# EAGLE board FlatSat_Final (EAGLE 9.6.2), part 1 of 2
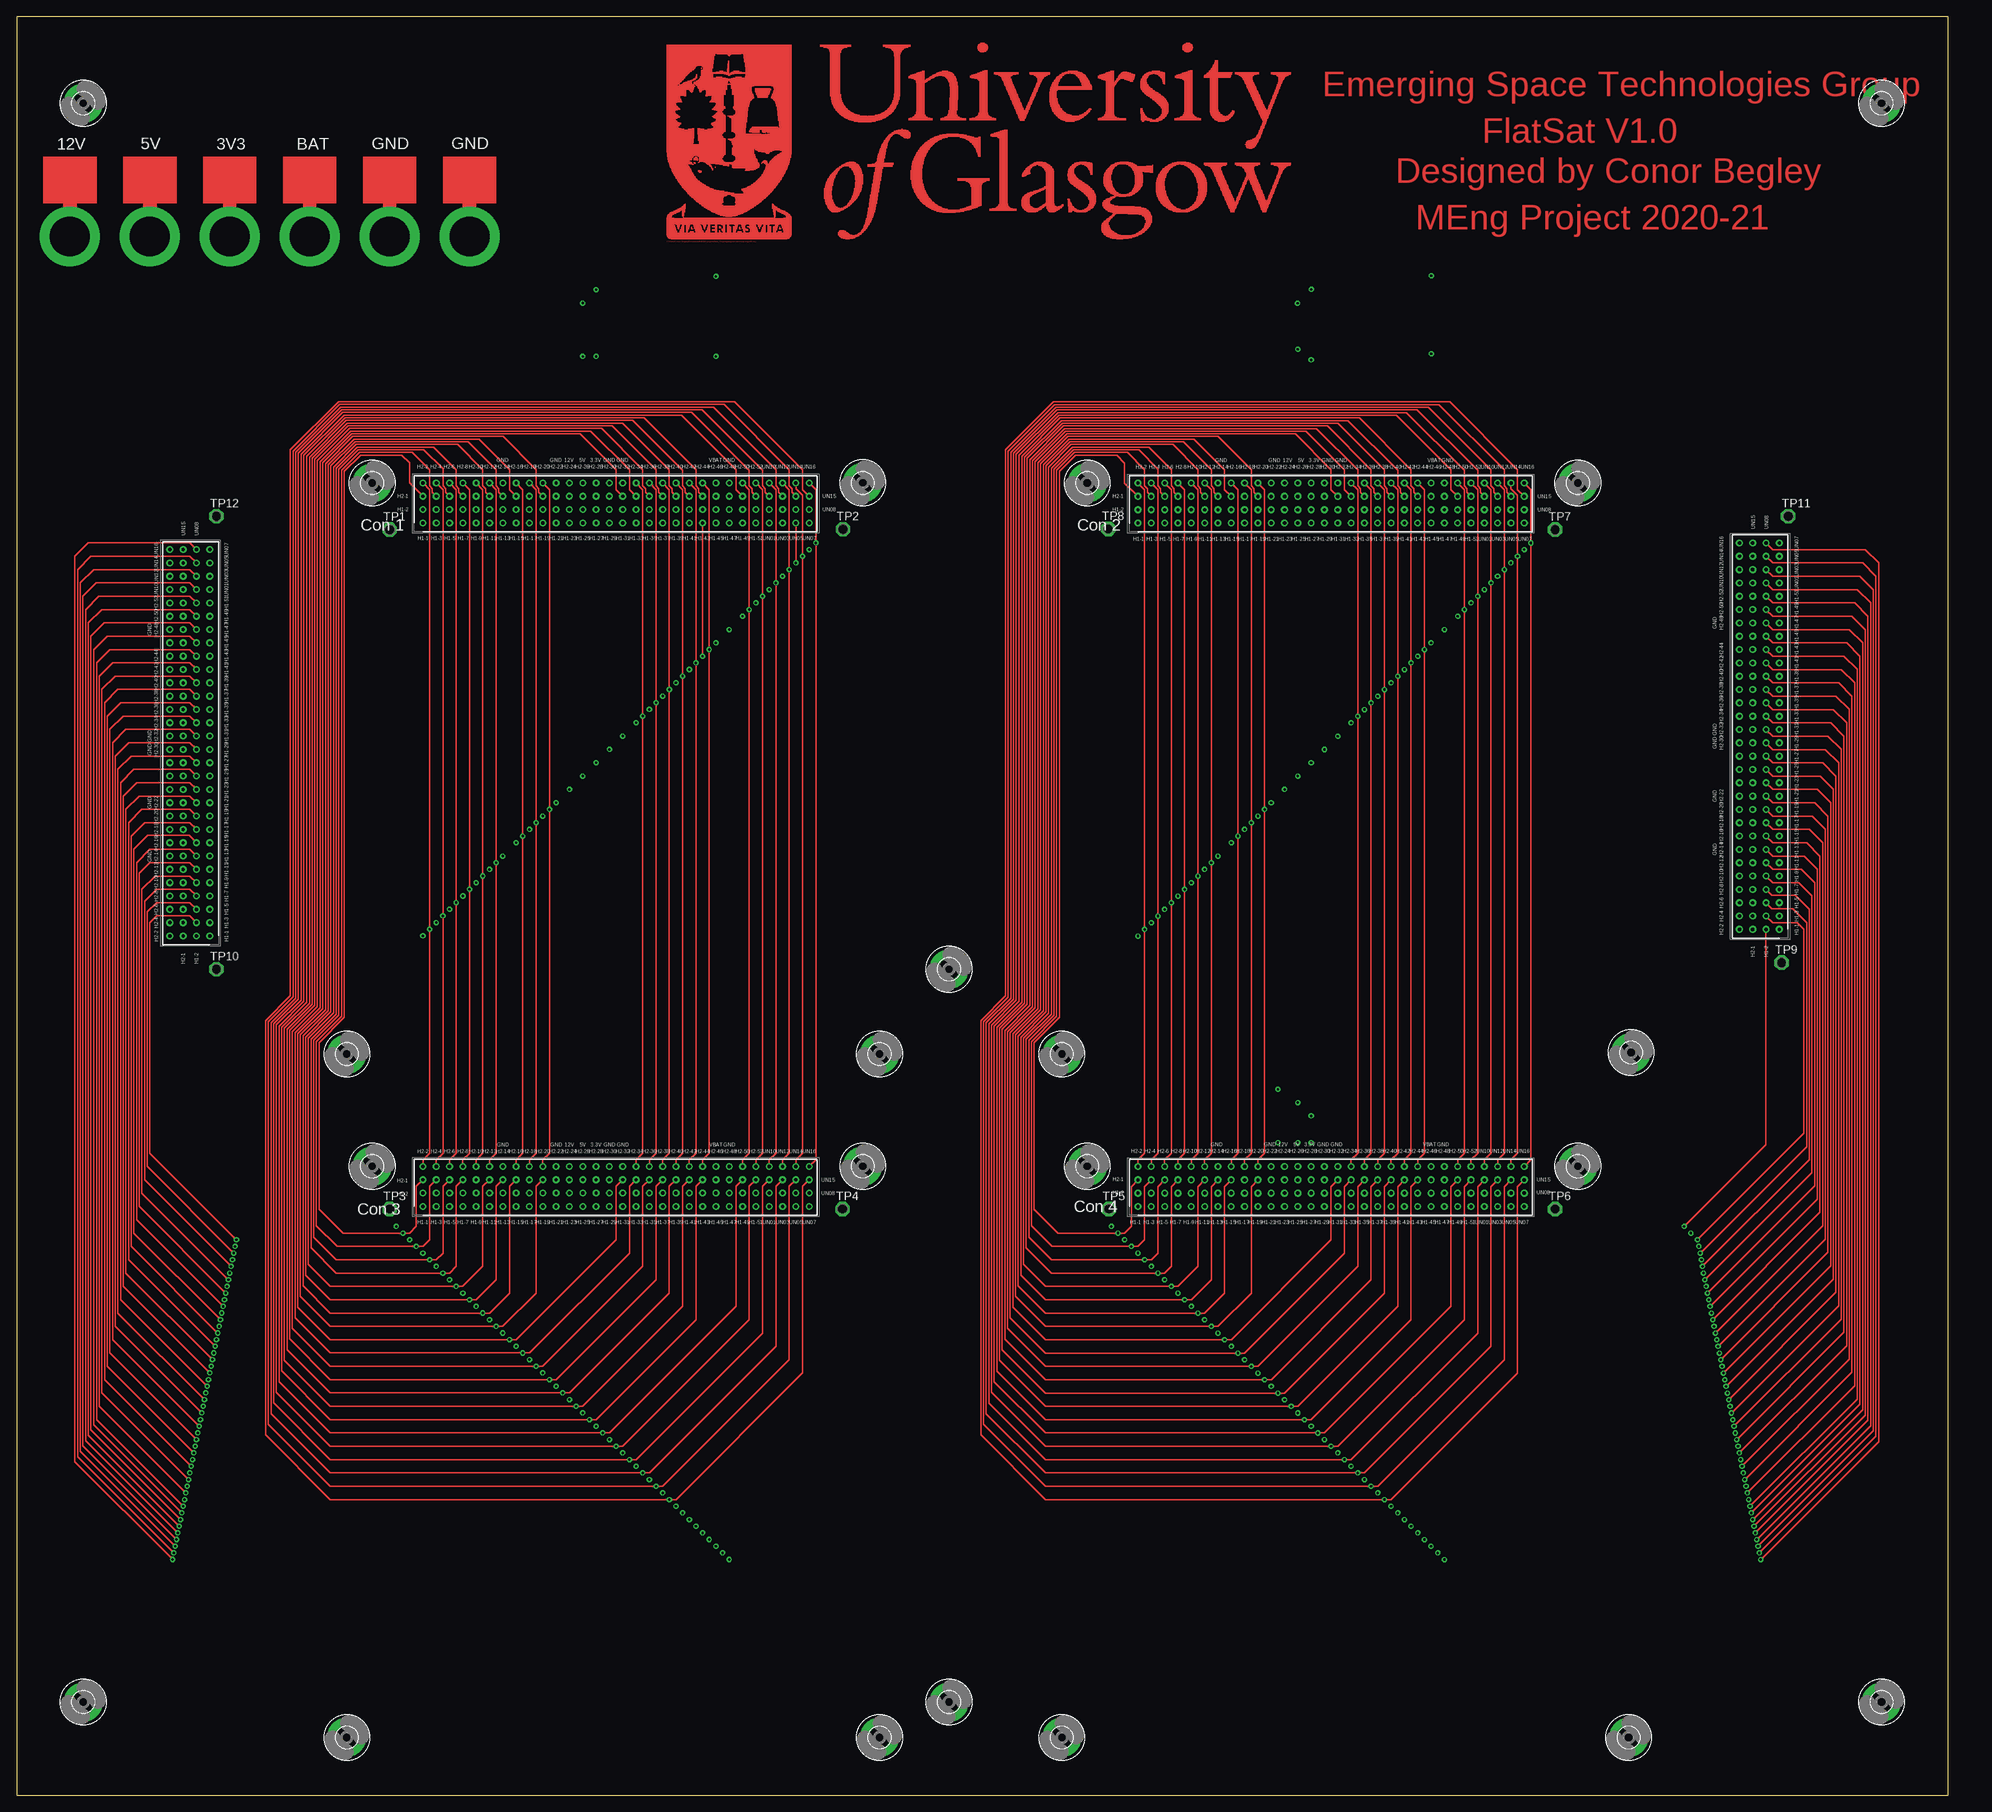
[diagram p0: board, top side]
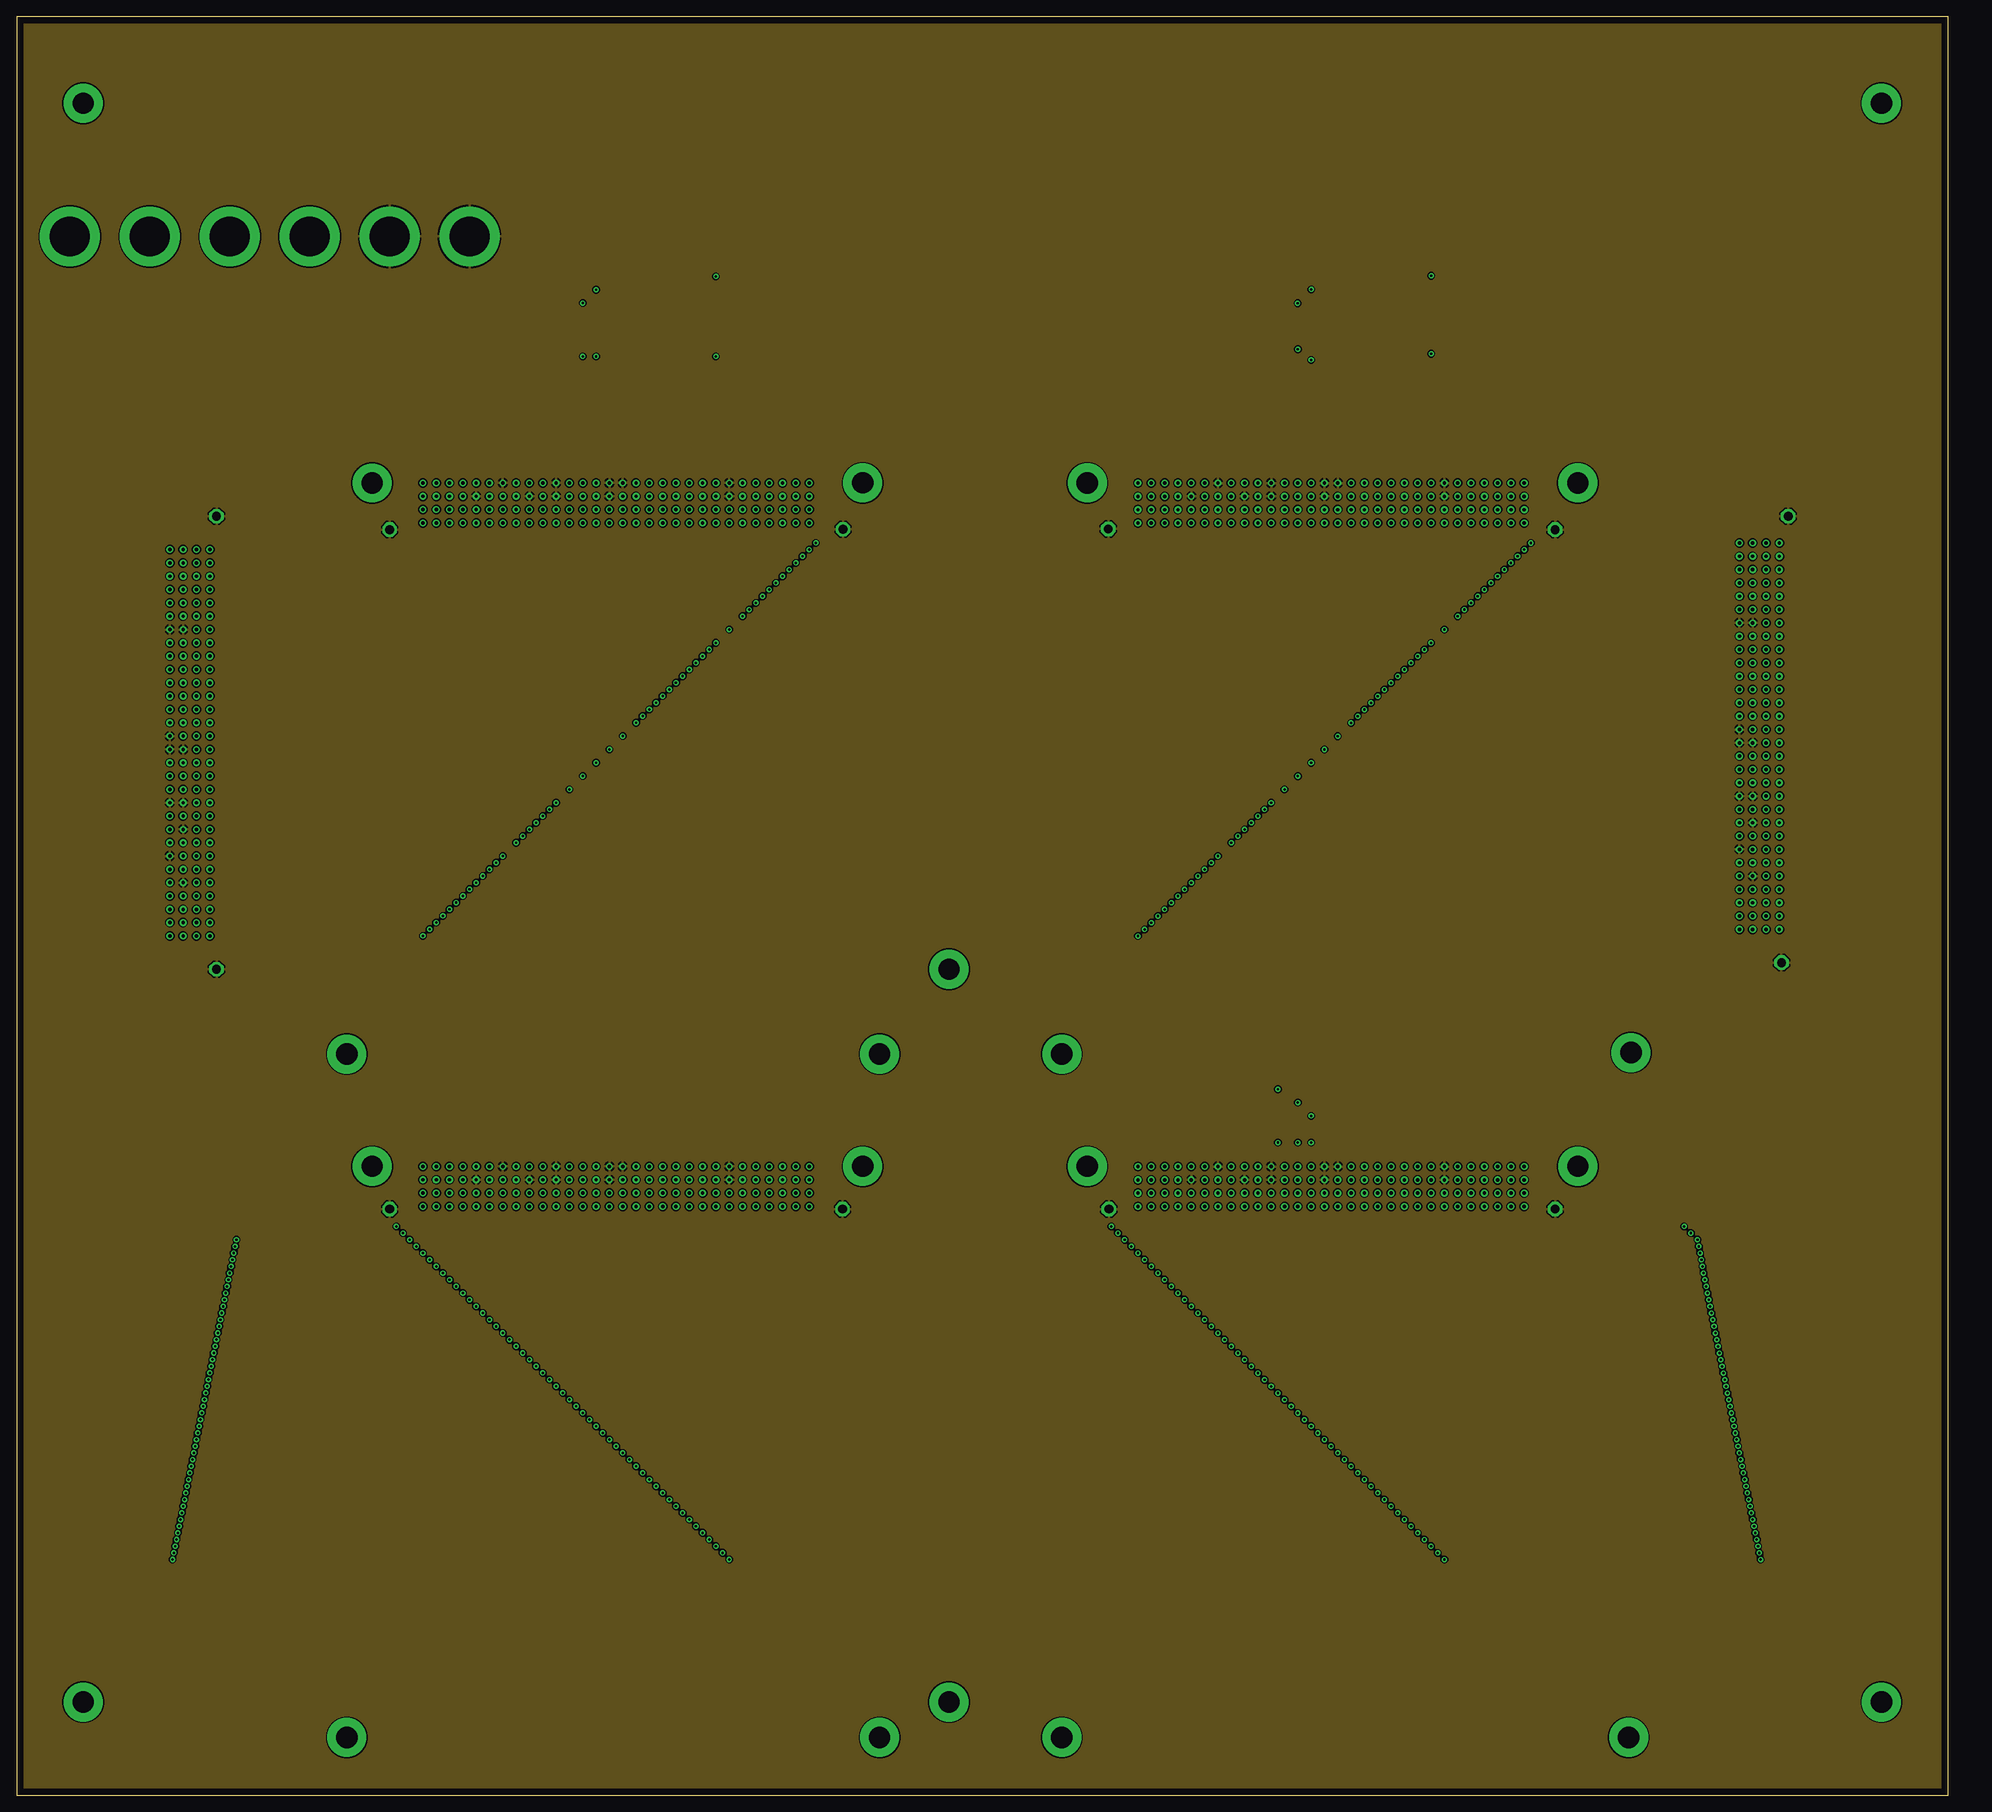
[diagram p1: board, inner layer Route2]
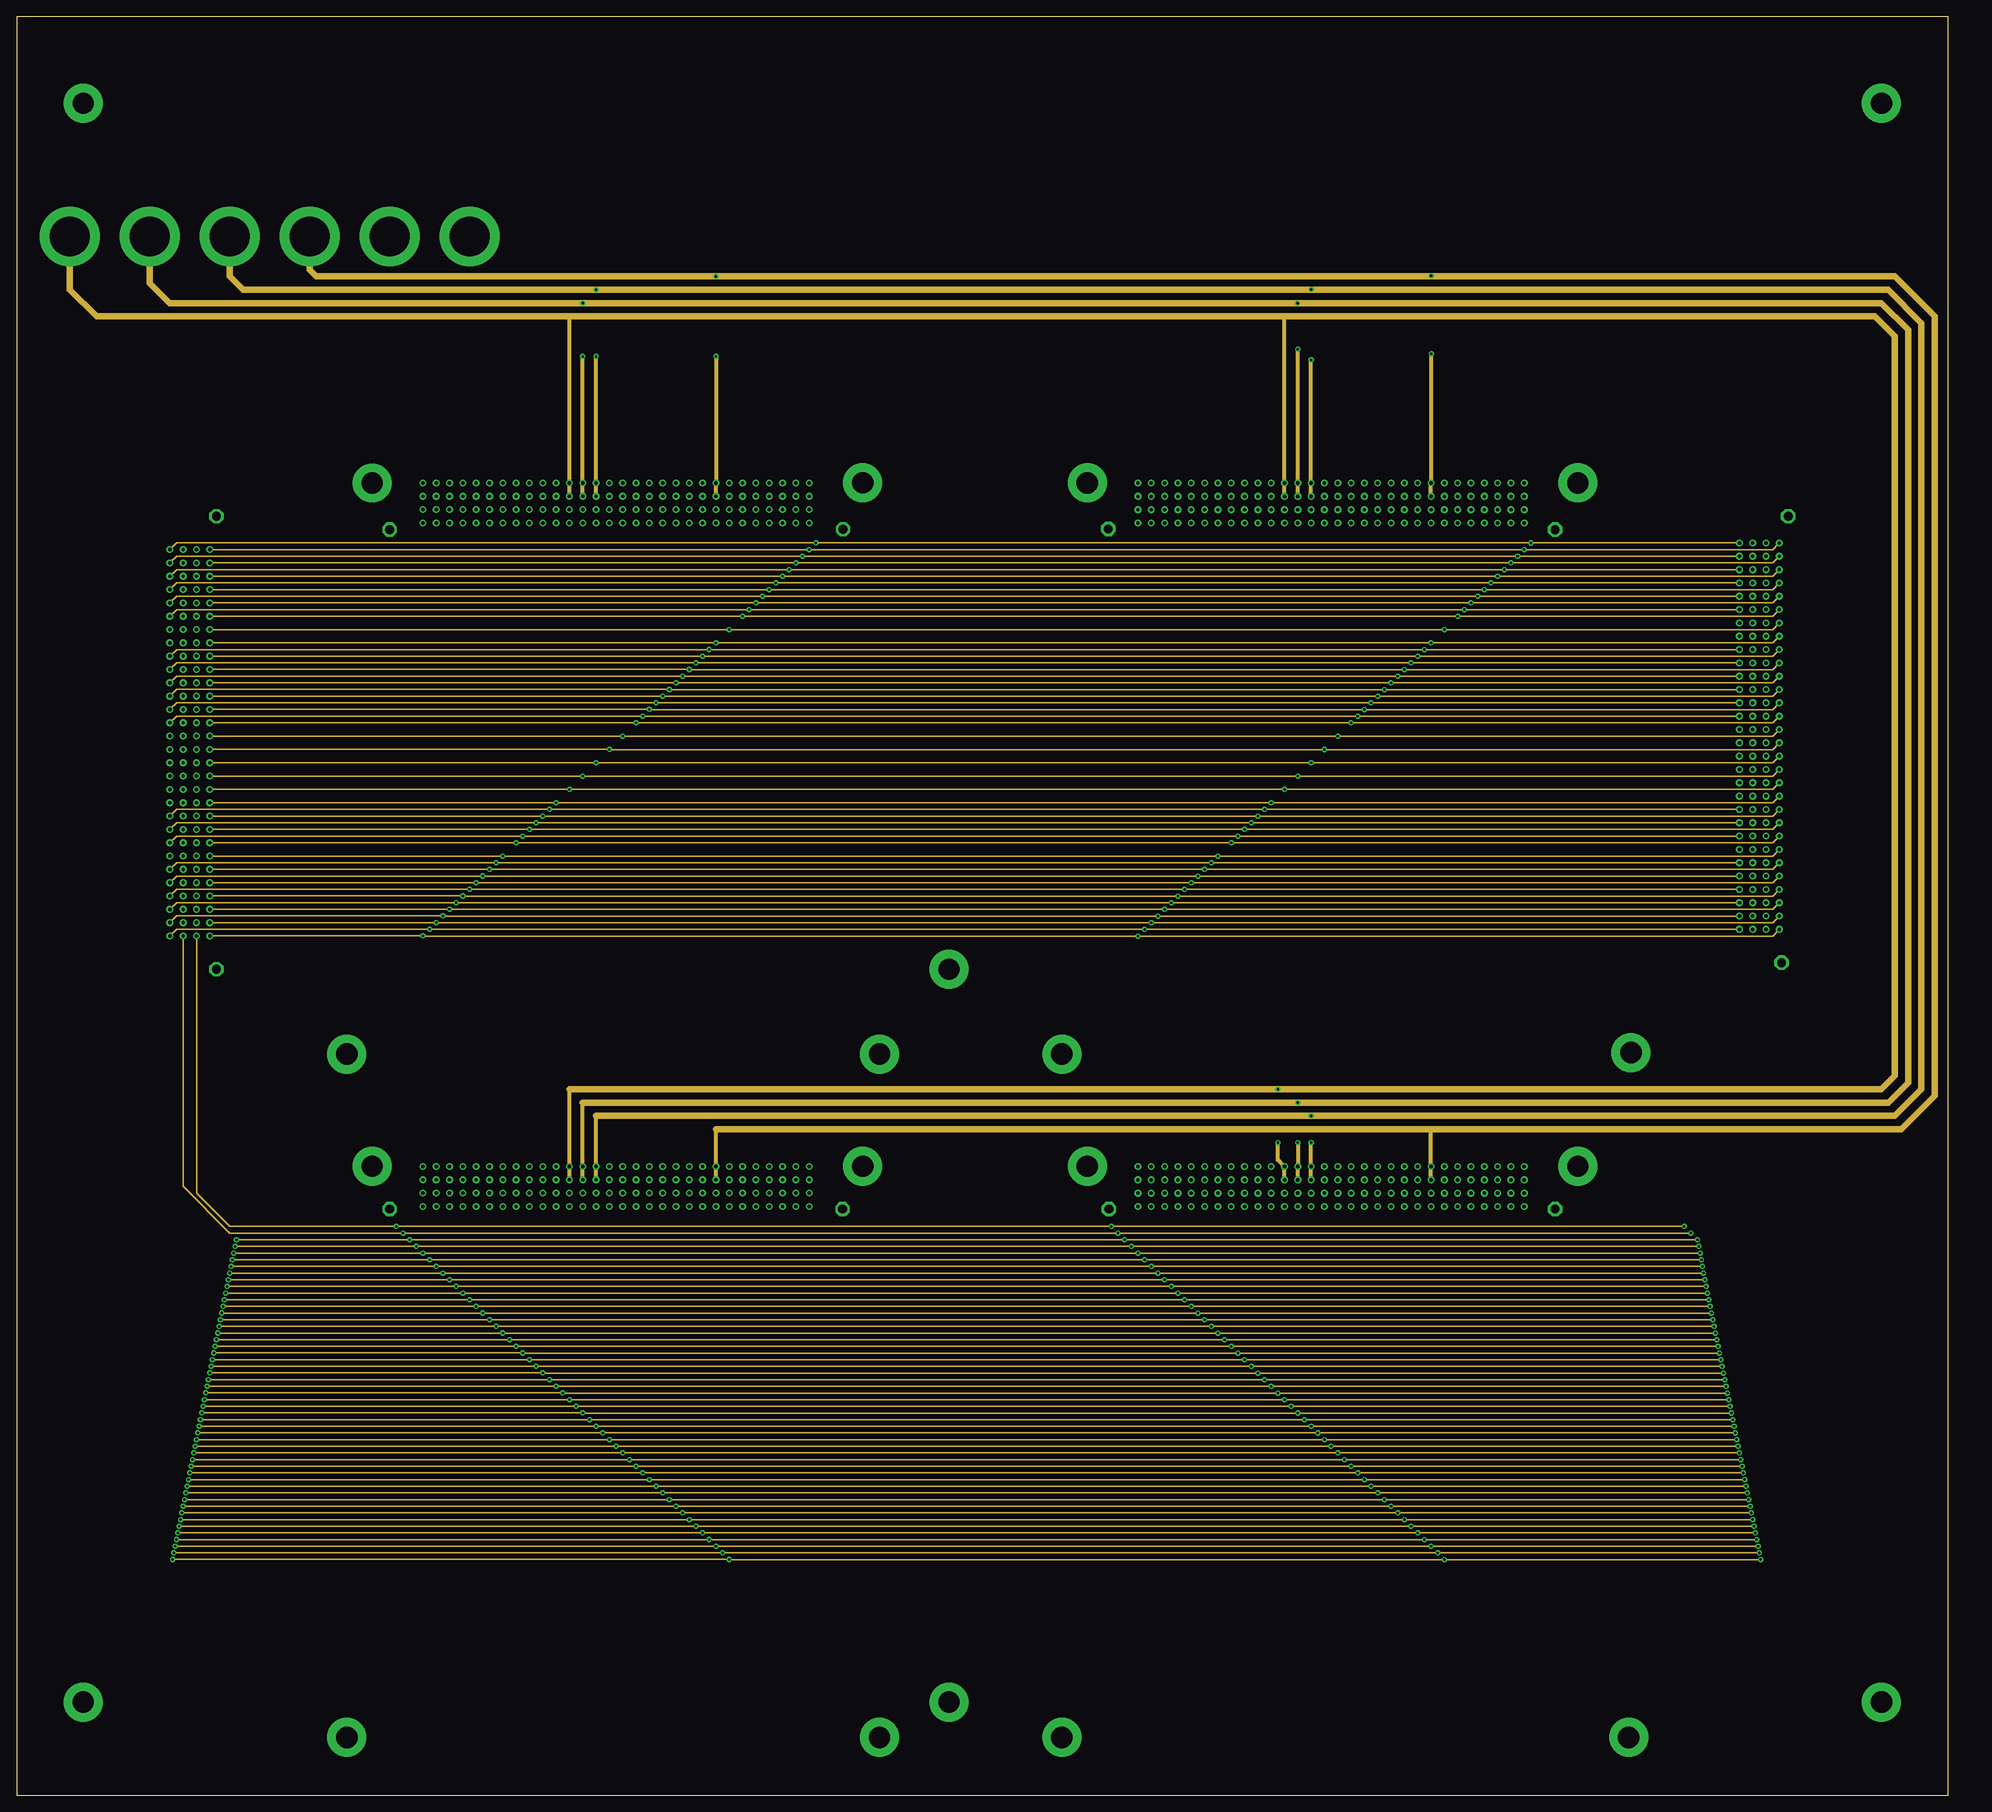
[diagram p2: board, inner layer Route15]
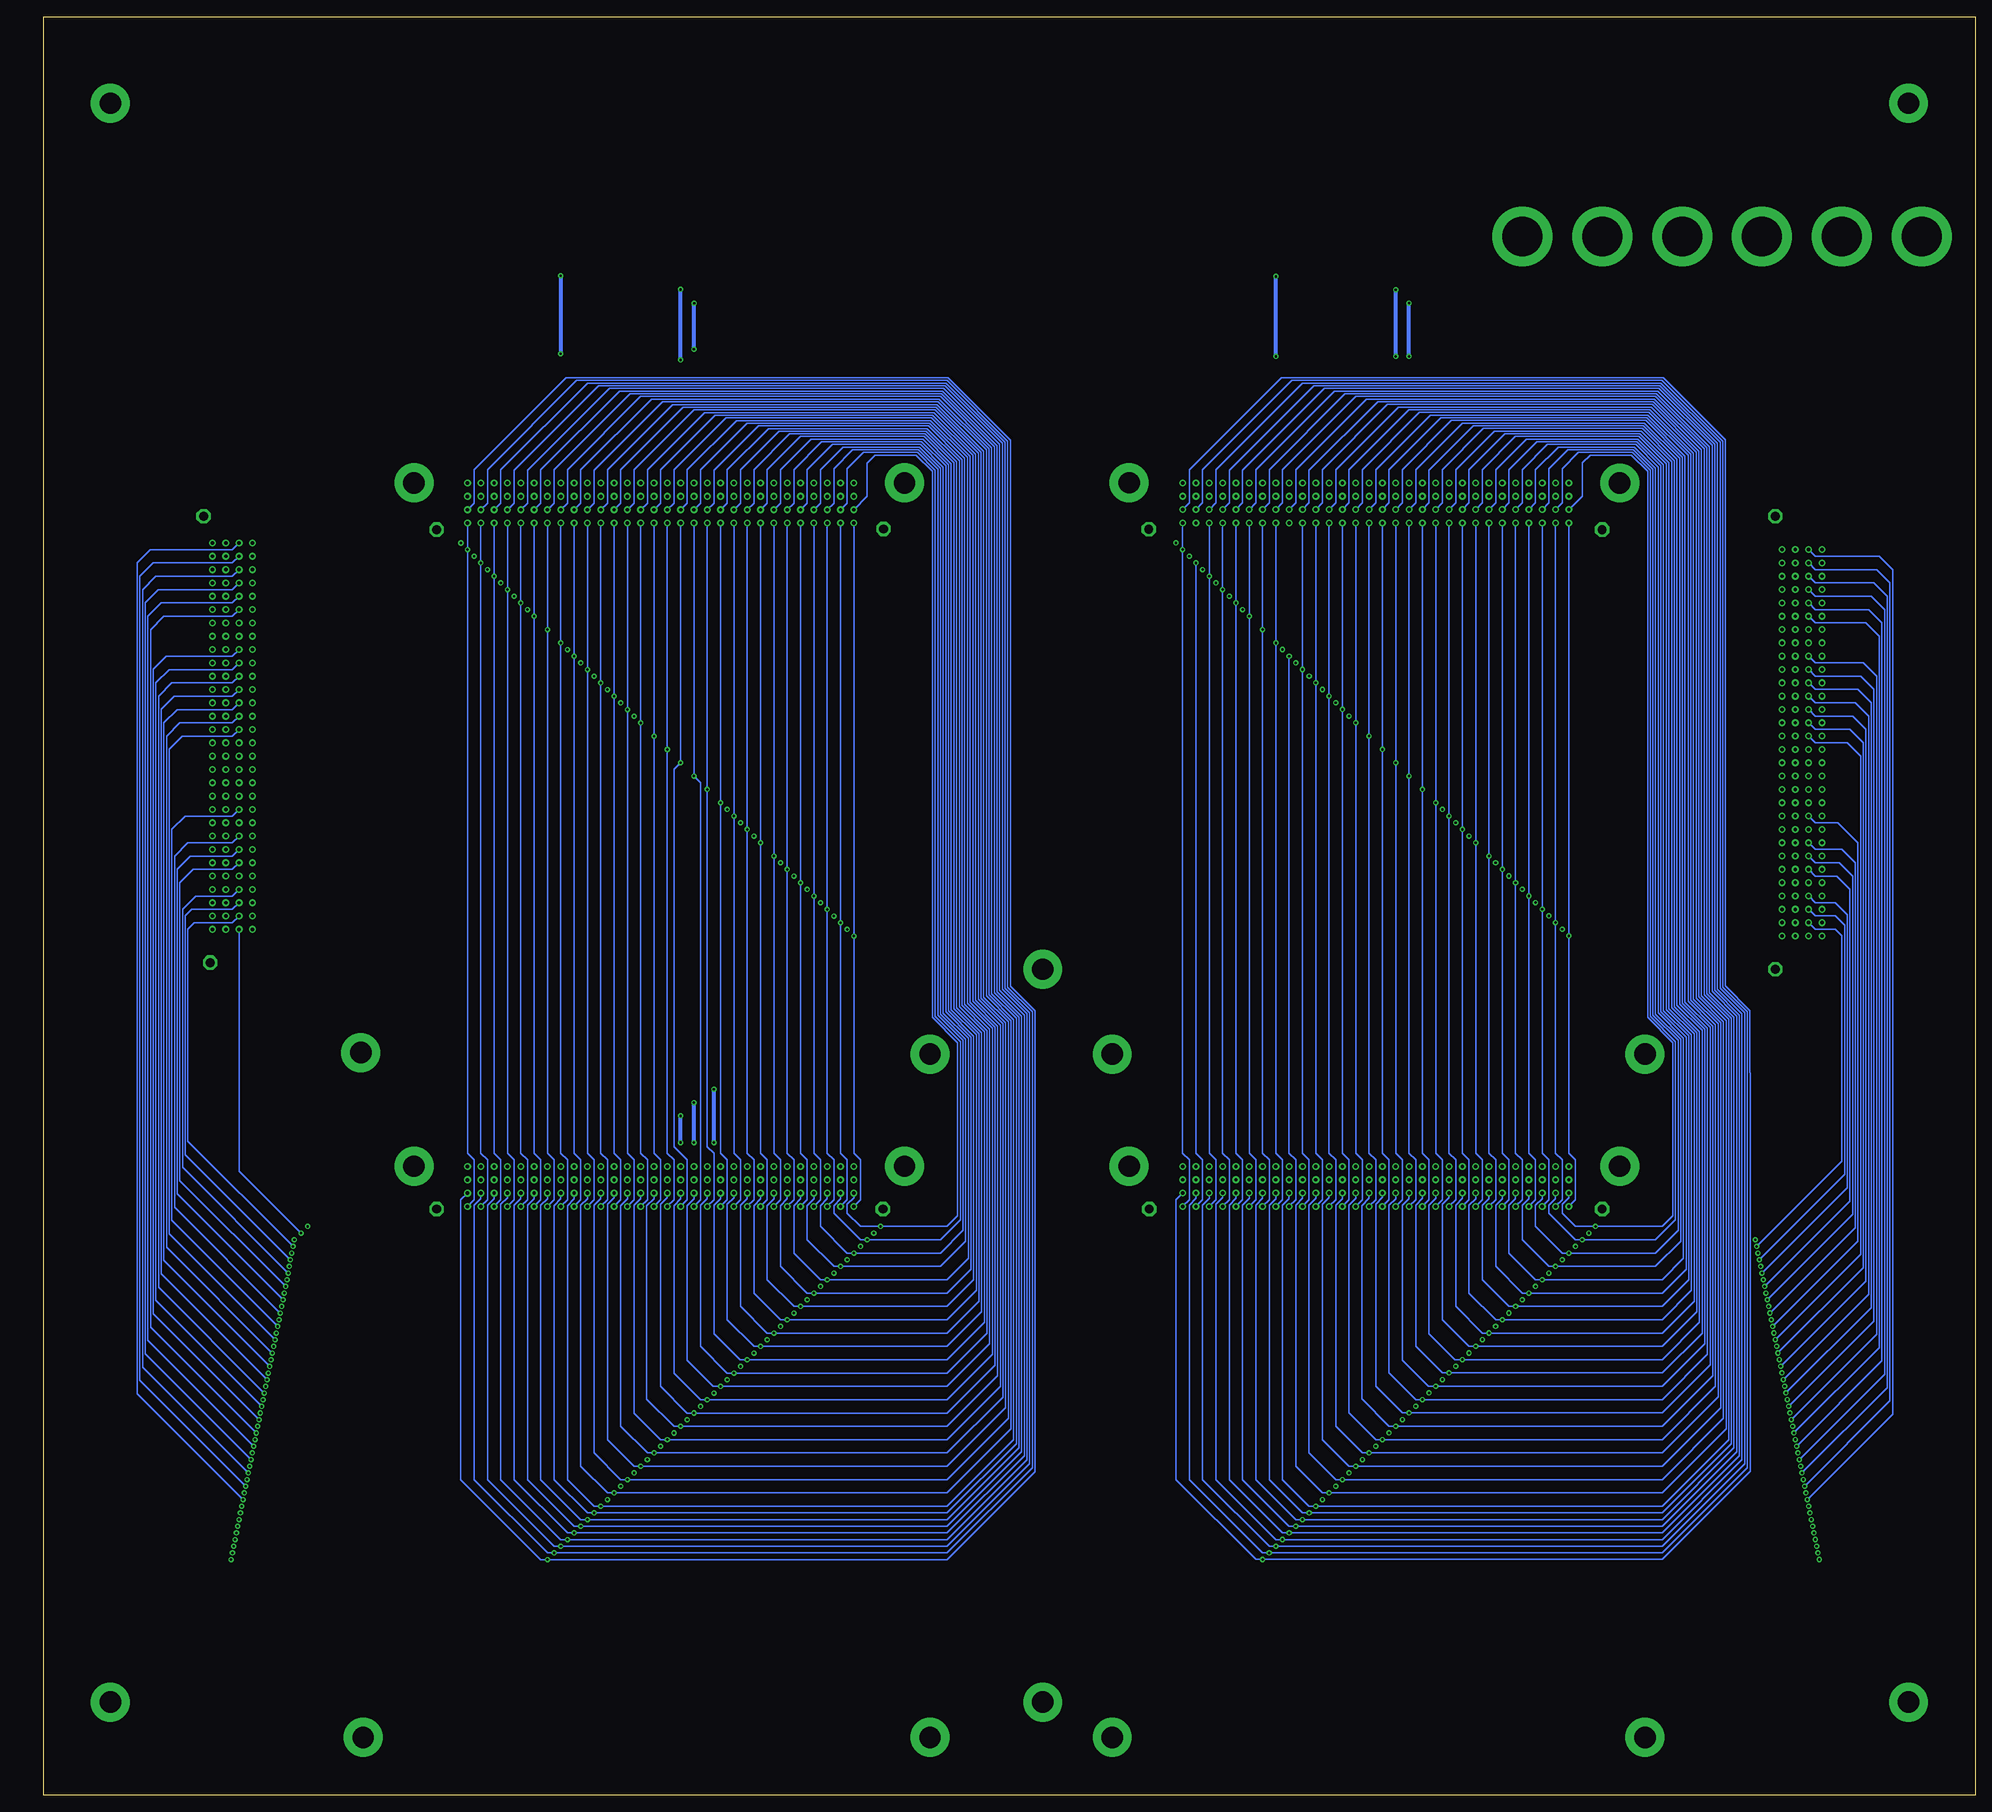
[diagram p3: board, bottom side, seen from below]

Size 290 x 267 mm. Coordinates in mm from the lower left corner, seen from the top.
Outline: 0,0 290,0 290,267 0,267 0,0
Copper layers (1*2*15*16): Top 0.035mm / dielectric 1.5mm / Route2 0.035mm / dielectric 0.15mm / Route15 0.035mm / dielectric 0.2mm / Bottom 0.035mm
Design rules "default *": minimum track width 6mil, minimum drill 0.35mm, track to track 0.2mm, track to pad 0.2mm, pad to pad 0.54mm, via to via 10mil, smd to smd 6mil, copper to edge 40mil, drill to drill 6mil, minimum pad ring 10mil, minimum via ring 8mil, stop-mask expansion 4mil, vias tented up to drill 0mil, thermal gap 10mil

## Footprints (pad centres in the part's own frame; a part is rotated, then mirrored left to right if it is on the bottom)
3,2-PAD = drill 3.2 pad 5.842: B3,2 0,0
RHDR120W55P200_4X30_6020X820X9 = drill 0.505 pad 0.9: P$1 0,6; P$2 2,6; P$3 4,6; P$4 6,6; P$5 8,6; P$6 10,6; P$7 12,6; P$8 14,6; P$9 16,6; P$10 18,6; P$11 20,6; P$12 22,6; P$13 24,6; P$14 26,6; P$15 28,6; P$16 30,6; P$17 32,6; P$18 34,6; P$19 36,6; P$20 38,6; P$21 40,6; P$22 42,6; P$23 44,6; P$24 46,6; P$25 48,6; P$26 50,6; P$27 52,6; P$28 54,6; P$29 56,6; P$30 58,6; P$31 0,4; P$32 2,4; P$33 4,4; P$34 6,4; P$35 8,4; P$36 10,4; P$37 12,4; P$38 14,4; P$39 16,4; P$40 18,4; P$41 20,4; P$42 22,4; P$43 24,4; P$44 26,4; P$45 28,4; P$46 30,4; P$47 32,4; P$48 34,4; P$49 36,4; P$50 38,4; P$51 40,4; P$52 42,4; P$53 44,4; P$54 46,4; P$55 48,4; P$56 50,4; P$57 52,4; P$58 54,4; P$59 56,4; P$60 58,4; P$61 0,2; P$62 2,2; P$63 4,2; P$64 6,2; P$65 8,2; P$66 10,2; P$67 12,2; P$68 14,2; P$69 16,2; P$70 18,2; P$71 20,2; P$72 22,2; P$73 24,2; P$74 26,2; P$75 28,2; P$76 30,2; P$77 32,2; P$78 34,2; P$79 36,2; P$80 38,2; P$81 40,2; P$82 42,2; P$83 44,2; P$84 46,2; P$85 48,2; P$86 50,2; P$87 52,2; P$88 54,2; P$89 56,2; P$90 58,2; P$91 0,0; P$92 2,0; P$93 4,0; P$94 6,0; P$95 8,0; P$96 10,0; P$97 12,0; P$98 14,0; P$99 16,0; P$100 18,0; P$101 20,0; P$102 22,0; P$103 24,0; P$104 26,0; P$105 28,0; P$106 30,0; P$107 32,0; P$108 34,0; P$109 36,0; P$110 38,0; P$111 40,0; P$112 42,0; P$113 44,0; P$114 46,0; P$115 48,0; P$116 50,0; P$117 52,0; P$118 54,0; P$119 56,0; P$120 58,0
P1-13 = drill 1.321 pad 2.159 octagon: TP 0,0
BANANA-PRINT = drill 6 pad 9: P$1 0,0

## Placement (x,y rotation side)
H1  MOUNT-PAD-ROUND3.2  [3,2-PAD]  53.38,197 0 top
H2  MOUNT-PAD-ROUND3.2  [3,2-PAD]  127.04,197.02 0 top
H3  MOUNT-PAD-ROUND3.2  [3,2-PAD]  49.57,111.27 0 top
H4  MOUNT-PAD-ROUND3.2  [3,2-PAD]  129.57,111.27 0 top
H5  MOUNT-PAD-ROUND3.2  [3,2-PAD]  160.76,197.01 0 top
H6  MOUNT-PAD-ROUND3.2  [3,2-PAD]  234.41,197.01 0 top
H7  MOUNT-PAD-ROUND3.2  [3,2-PAD]  160.76,94.42 0 top
H8  MOUNT-PAD-ROUND3.2  [3,2-PAD]  156.94,111.27 0 top
H9  MOUNT-PAD-ROUND3.2  [3,2-PAD]  242.4,111.5 0 top
H10  MOUNT-PAD-ROUND3.2  [3,2-PAD]  156.94,8.69 0 top
H11  MOUNT-PAD-ROUND3.2  [3,2-PAD]  242.04,8.69 0 top
H12  MOUNT-PAD-ROUND3.2  [3,2-PAD]  234.41,94.42 0 top
H13  MOUNT-PAD-ROUND3.2  [3,2-PAD]  53.38,94.42 0 top
H14  MOUNT-PAD-ROUND3.2  [3,2-PAD]  127.04,94.42 0 top
H15  MOUNT-PAD-ROUND3.2  [3,2-PAD]  49.57,8.69 0 top
H16  MOUNT-PAD-ROUND3.2  [3,2-PAD]  129.57,8.69 0 top
H17  MOUNT-PAD-ROUND3.2  [3,2-PAD]  10,254 0 top
H18  MOUNT-PAD-ROUND3.2  [3,2-PAD]  280,14 0 top
H19  MOUNT-PAD-ROUND3.2  [3,2-PAD]  10,14 0 top
H20  MOUNT-PAD-ROUND3.2  [3,2-PAD]  280,254 0 top
H21  MOUNT-PAD-ROUND3.2  [3,2-PAD]  140,14 0 top
H22  MOUNT-PAD-ROUND3.2  [3,2-PAD]  140,124 0 top
J1  M22-6013005  [RHDR120W55P200_4X30_6020X820X9]  61,88.4 0 top
J2  M22-6013005  [RHDR120W55P200_4X30_6020X820X9]  61,191 0 top
J3  M22-6013005  [RHDR120W55P200_4X30_6020X820X9]  168.37,88.39 0 top
J4  M22-6013005  [RHDR120W55P200_4X30_6020X820X9]  168.37,190.99 0 top
J5  M22-6013005  [RHDR120W55P200_4X30_6020X820X9]  29,129 90 top
J6  M22-6013005  [RHDR120W55P200_4X30_6020X820X9]  264.67,129.99 90 top
TP1  PTR1PAD1-13  [P1-13]  56,190 0 top
TP2  PTR1PAD1-13  [P1-13]  124.08,190.06 0 top
TP3  PTR1PAD1-13  [P1-13]  56,88 0 top
TP4  PTR1PAD1-13  [P1-13]  124,88 0 top
TP5  PTR1PAD1-13  [P1-13]  164,88 0 top
TP6  PTR1PAD1-13  [P1-13]  231,88 0 top
TP7  PTR1PAD1-13  [P1-13]  231,190 0 top
TP8  PTR1PAD1-13  [P1-13]  163.91,190.1 0 top
TP9  PTR1PAD1-13  [P1-13]  265,125 0 top
TP10  PTR1PAD1-13  [P1-13]  30,124 0 top
TP11  PTR1PAD1-13  [P1-13]  266,192 0 top
TP12  PTR1PAD1-13  [P1-13]  30,192 0 top
U$1  BANANA-JACK  [BANANA-PRINT]  8,234 0 top
U$2  BANANA-JACK  [BANANA-PRINT]  20,234 0 top
U$3  BANANA-JACK  [BANANA-PRINT]  32,234 0 top
U$4  BANANA-JACK  [BANANA-PRINT]  68,234 0 top
U$5  BANANA-JACK  [BANANA-PRINT]  56,234 0 top
U$6  BANANA-JACK  [BANANA-PRINT]  44,234 0 top

## Library data of the parts
H1-H22 = holes
J1-J6 = M22-6013005; DESCRIPTION: HARWIN - M22-6013005 - PCB Receptacle, Board-to-Board, 2 mm, 4 Rows, 120 Contacts, Through Hole Mount, M22 Series; HEIGHT: 9.65mm; MANUFACTURER_NAME: Harwin; MANUFACTURER_PART_NUMBER: M22-6013005
TP1-TP12 = testpad
U$1-U$6 = con-banana

## Nets
+3.3V: J1.P$14 J1.P$44 J2.P$14 J2.P$44 J3.P$14 J3.P$44 J4.P$14 J4.P$44 U$3.P$1
+5V: J1.P$13 J1.P$43 J2.P$13 J2.P$43 J3.P$13 J3.P$43 J4.P$13 J4.P$43 U$2.P$1
+12V: J1.P$12 J1.P$42 J2.P$12 J2.P$42 J3.P$12 J3.P$42 J4.P$12 J4.P$42 U$1.P$1
GND: J1.P$7 J1.P$11 J1.P$15 J1.P$16 J1.P$24 J1.P$35 J1.P$39 J1.P$41 J1.P$45 J1.P$54 J2.P$7 J2.P$11 J2.P$15 J2.P$16 J2.P$24 J2.P$35 J2.P$39 J2.P$41 J2.P$45 J2.P$54 J3.P$7 J3.P$11 J3.P$15 J3.P$16 J3.P$24 J3.P$35 J3.P$39 J3.P$41 J3.P$45 J3.P$54 J4.P$7 J4.P$11 J4.P$15 J4.P$16 J4.P$24 J4.P$35 J4.P$39 J4.P$41 J4.P$45 J4.P$54 J5.P$7 J5.P$11 J5.P$15 J5.P$16 J5.P$24 J5.P$35 J5.P$39 J5.P$41 J5.P$45 J5.P$54 J6.P$7 J6.P$11 J6.P$15 J6.P$16 J6.P$24 J6.P$35 J6.P$39 J6.P$41 J6.P$45 J6.P$54 TP1.TP TP2.TP TP3.TP TP4.TP TP5.TP TP6.TP TP7.TP TP8.TP TP9.TP TP10.TP TP11.TP TP12.TP U$4.P$1 U$5.P$1
H1-1: J1.P$91 J2.P$91 J3.P$91 J4.P$91 J5.P$91 J6.P$91
H1-2: J1.P$61 J2.P$61 J3.P$61 J4.P$61 J5.P$61 J6.P$61
H1-3: J1.P$92 J2.P$92 J3.P$92 J4.P$92 J5.P$92 J6.P$92
H1-4: J1.P$62 J2.P$62 J3.P$62 J4.P$62 J5.P$62 J6.P$62
H1-5: J1.P$93 J2.P$93 J3.P$93 J4.P$93 J5.P$93 J6.P$93
H1-6: J1.P$63 J2.P$63 J3.P$63 J4.P$63 J5.P$63 J6.P$63
H1-7: J1.P$94 J2.P$94 J3.P$94 J4.P$94 J5.P$94 J6.P$94
H1-8: J1.P$64 J2.P$64 J3.P$64 J4.P$64 J5.P$64 J6.P$64
H1-9: J1.P$95 J2.P$95 J3.P$95 J4.P$95 J5.P$95 J6.P$95
H1-10: J1.P$65 J2.P$65 J3.P$65 J4.P$65 J5.P$65 J6.P$65
H1-11: J1.P$96 J2.P$96 J3.P$96 J4.P$96 J5.P$96 J6.P$96
H1-12: J1.P$66 J2.P$66 J3.P$66 J4.P$66 J5.P$66 J6.P$66
H1-13: J1.P$97 J2.P$97 J3.P$97 J4.P$97 J5.P$97 J6.P$97
H1-14: J1.P$67 J2.P$67 J3.P$67 J4.P$67 J5.P$67 J6.P$67
H1-15: J1.P$98 J2.P$98 J3.P$98 J4.P$98 J5.P$98 J6.P$98
H1-16: J1.P$68 J2.P$68 J3.P$68 J4.P$68 J5.P$68 J6.P$68
H1-17: J1.P$99 J2.P$99 J3.P$99 J4.P$99 J5.P$99 J6.P$99
H1-18: J1.P$69 J2.P$69 J3.P$69 J4.P$69 J5.P$69 J6.P$69
H1-19: J1.P$100 J2.P$100 J3.P$100 J4.P$100 J5.P$100 J6.P$100
H1-20: J1.P$70 J2.P$70 J3.P$70 J4.P$70 J5.P$70 J6.P$70
H1-21: J1.P$101 J2.P$101 J3.P$101 J4.P$101 J5.P$101 J6.P$101
H1-22: J1.P$71 J2.P$71 J3.P$71 J4.P$71 J5.P$71 J6.P$71
H1-23: J1.P$102 J2.P$102 J3.P$102 J4.P$102 J5.P$102 J6.P$102
H1-24: J1.P$72 J2.P$72 J3.P$72 J4.P$72 J5.P$72 J6.P$72
H1-25: J1.P$103 J2.P$103 J3.P$103 J4.P$103 J5.P$103 J6.P$103
H1-26: J1.P$73 J2.P$73 J3.P$73 J4.P$73 J5.P$73 J6.P$73
H1-27: J1.P$104 J2.P$104 J3.P$104 J4.P$104 J5.P$104 J6.P$104
H1-28: J1.P$74 J2.P$74 J3.P$74 J4.P$74 J5.P$74 J6.P$74
H1-29: J1.P$105 J2.P$105 J3.P$105 J4.P$105 J5.P$105 J6.P$105
H1-30: J1.P$75 J2.P$75 J3.P$75 J4.P$75 J5.P$75 J6.P$75
H1-31: J1.P$106 J2.P$106 J3.P$106 J4.P$106 J5.P$106 J6.P$106
H1-32: J1.P$76 J2.P$76 J3.P$76 J4.P$76 J5.P$76 J6.P$76
H1-33: J1.P$107 J2.P$107 J3.P$107 J4.P$107 J5.P$107 J6.P$107
H1-34: J1.P$77 J2.P$77 J3.P$77 J4.P$77 J5.P$77 J6.P$77
H1-35: J1.P$108 J2.P$108 J3.P$108 J4.P$108 J5.P$108 J6.P$108
H1-36: J1.P$78 J2.P$78 J3.P$78 J4.P$78 J5.P$78 J6.P$78
H1-37: J1.P$109 J2.P$109 J3.P$109 J4.P$109 J5.P$109 J6.P$109
H1-38: J1.P$79 J2.P$79 J3.P$79 J4.P$79 J5.P$79 J6.P$79
H1-39: J1.P$110 J2.P$110 J3.P$110 J4.P$110 J5.P$110 J6.P$110
H1-40: J1.P$80 J2.P$80 J3.P$80 J4.P$80 J5.P$80 J6.P$80
H1-41: J1.P$111 J2.P$111 J3.P$111 J4.P$111 J5.P$111 J6.P$111
H1-42: J1.P$81 J2.P$81 J3.P$81 J4.P$81 J5.P$81 J6.P$81
H1-43: J1.P$112 J2.P$112 J3.P$112 J4.P$112 J5.P$112 J6.P$112
H1-44: J1.P$82 J2.P$82 J3.P$82 J4.P$82 J5.P$82 J6.P$82
H1-45: J1.P$113 J2.P$113 J3.P$113 J4.P$113 J5.P$113 J6.P$113
H1-46: J1.P$83 J2.P$83 J3.P$83 J4.P$83 J5.P$83 J6.P$83
H1-47: J1.P$114 J2.P$114 J3.P$114 J4.P$114 J5.P$114 J6.P$114
H1-48: J1.P$84 J2.P$84 J3.P$84 J4.P$84 J5.P$84 J6.P$84
H1-49: J1.P$115 J2.P$115 J3.P$115 J4.P$115 J5.P$115 J6.P$115
H1-50: J1.P$85 J2.P$85 J3.P$85 J4.P$85 J5.P$85 J6.P$85
H1-51: J1.P$116 J2.P$116 J3.P$116 J4.P$116 J5.P$116 J6.P$116
H1-52: J1.P$86 J2.P$86 J3.P$86 J4.P$86 J5.P$86 J6.P$86
H2-1: J1.P$31 J2.P$31 J3.P$31 J4.P$31 J5.P$31 J6.P$31
H2-2: J1.P$1 J2.P$1 J3.P$1 J4.P$1 J5.P$1 J6.P$1
H2-3: J1.P$32 J2.P$32 J3.P$32 J4.P$32 J5.P$32 J6.P$32
H2-4: J1.P$2 J2.P$2 J3.P$2 J4.P$2 J5.P$2 J6.P$2
H2-5: J1.P$33 J2.P$33 J3.P$33 J4.P$33 J5.P$33 J6.P$33
H2-6: J1.P$3 J2.P$3 J3.P$3 J4.P$3 J5.P$3 J6.P$3
H2-7: J1.P$34 J2.P$34 J3.P$34 J4.P$34 J5.P$34 J6.P$34
H2-8: J1.P$4 J2.P$4 J3.P$4 J4.P$4 J5.P$4 J6.P$4
H2-10: J1.P$5 J2.P$5 J3.P$5 J4.P$5 J5.P$5 J6.P$5
H2-11: J1.P$36 J2.P$36 J3.P$36 J4.P$36 J5.P$36 J6.P$36
H2-12: J1.P$6 J2.P$6 J3.P$6 J4.P$6 J5.P$6 J6.P$6
H2-13: J1.P$37 J2.P$37 J3.P$37 J4.P$37 J5.P$37 J6.P$37
H2-15: J1.P$38 J2.P$38 J3.P$38 J4.P$38 J5.P$38 J6.P$38
H2-16: J1.P$8 J2.P$8 J3.P$8 J4.P$8 J5.P$8 J6.P$8
H2-18: J1.P$9 J2.P$9 J3.P$9 J4.P$9 J5.P$9 J6.P$9
H2-19: J1.P$40 J2.P$40 J3.P$40 J4.P$40 J5.P$40 J6.P$40
H2-20: J1.P$10 J2.P$10 J3.P$10 J4.P$10 J5.P$10 J6.P$10
H2-31: J1.P$46 J2.P$46 J3.P$46 J4.P$46 J5.P$46 J6.P$46
H2-33: J1.P$47 J2.P$47 J3.P$47 J4.P$47 J5.P$47 J6.P$47
H2-34: J1.P$17 J2.P$17 J3.P$17 J4.P$17 J5.P$17 J6.P$17
H2-35: J1.P$48 J2.P$48 J3.P$48 J4.P$48 J5.P$48 J6.P$48
H2-36: J1.P$18 J2.P$18 J3.P$18 J4.P$18 J5.P$18 J6.P$18
H2-37: J1.P$49 J2.P$49 J3.P$49 J4.P$49 J5.P$49 J6.P$49
H2-38: J1.P$19 J2.P$19 J3.P$19 J4.P$19 J5.P$19 J6.P$19
H2-39: J1.P$50 J2.P$50 J3.P$50 J4.P$50 J5.P$50 J6.P$50
H2-40: J1.P$20 J2.P$20 J3.P$20 J4.P$20 J5.P$20 J6.P$20
H2-41: J1.P$51 J2.P$51 J3.P$51 J4.P$51 J5.P$51 J6.P$51
H2-42: J1.P$21 J2.P$21 J3.P$21 J4.P$21 J5.P$21 J6.P$21
H2-43: J1.P$52 J2.P$52 J3.P$52 J4.P$52 J5.P$52 J6.P$52
H2-44: J1.P$22 J2.P$22 J3.P$22 J4.P$22 J5.P$22 J6.P$22
H2-49: J1.P$55 J2.P$55 J3.P$55 J4.P$55 J5.P$55 J6.P$55
H2-50: J1.P$25 J2.P$25 J3.P$25 J4.P$25 J5.P$25 J6.P$25
H2-51: J1.P$56 J2.P$56 J3.P$56 J4.P$56 J5.P$56 J6.P$56
H2-52: J1.P$26 J2.P$26 J3.P$26 J4.P$26 J5.P$26 J6.P$26
N$1: J5.P$44
N$2: J5.P$43
N$3: J5.P$42
N$4: J6.P$44
N$5: J6.P$43
N$6: J6.P$42
N$7: H1.B3,2
N$8: H2.B3,2
N$9: H3.B3,2
N$10: H4.B3,2
N$11: H5.B3,2
N$12: H6.B3,2
N$13: H7.B3,2
N$14: H8.B3,2
N$15: H9.B3,2
N$16: H10.B3,2
N$17: H11.B3,2
N$18: H12.B3,2
N$19: H13.B3,2
N$20: H14.B3,2
N$21: H15.B3,2
N$22: H16.B3,2
N$23: H17.B3,2
N$24: H18.B3,2
N$25: H19.B3,2
N$26: H20.B3,2
N$27: H21.B3,2
N$28: H22.B3,2
UN01: J1.P$117 J2.P$117 J3.P$117 J4.P$117 J5.P$117 J6.P$117
UN02: J1.P$87 J2.P$87 J3.P$87 J4.P$87 J5.P$87 J6.P$87
UN03: J1.P$118 J2.P$118 J3.P$118 J4.P$118 J5.P$118 J6.P$118
UN04: J1.P$88 J2.P$88 J3.P$88 J4.P$88 J5.P$88 J6.P$88
UN05: J1.P$119 J2.P$119 J3.P$119 J4.P$119 J5.P$119 J6.P$119
UN06: J1.P$89 J2.P$89 J3.P$89 J4.P$89 J5.P$89 J6.P$89
UN07: J1.P$120 J2.P$120 J3.P$120 J4.P$120 J5.P$120 J6.P$120
UN08: J1.P$90 J2.P$90 J3.P$90 J4.P$90 J5.P$90 J6.P$90
UN09: J1.P$57 J2.P$57 J3.P$57 J4.P$57 J5.P$57 J6.P$57
UN10: J1.P$27 J2.P$27 J3.P$27 J4.P$27 J5.P$27 J6.P$27
UN11: J1.P$58 J2.P$58 J3.P$58 J4.P$58 J5.P$58 J6.P$58
UN12: J1.P$28 J2.P$28 J3.P$28 J4.P$28 J5.P$28 J6.P$28
UN13: J1.P$59 J2.P$59 J3.P$59 J4.P$59 J5.P$59 J6.P$59
UN14: J1.P$29 J2.P$29 J3.P$29 J4.P$29 J5.P$29 J6.P$29
UN15: J1.P$60 J2.P$60 J3.P$60 J4.P$60 J5.P$60 J6.P$60
UN16: J1.P$30 J2.P$30 J3.P$30 J4.P$30 J5.P$30 J6.P$30
VBAT: J1.P$23 J1.P$53 J2.P$23 J2.P$53 J3.P$23 J3.P$53 J4.P$23 J4.P$53 U$6.P$1